# Altium PCB Adapter_JLink.PcbDoc
Units mm, origin at the board's own origin, x right, y up, seen from the top; angles counter-clockwise.
Board outline 23.62 x 33.91 mm, 2 copper layers (Top Layer, Bottom Layer), stack 1.621 mm thick; 12 components, 10 nets, 40 pads, 89 vias.
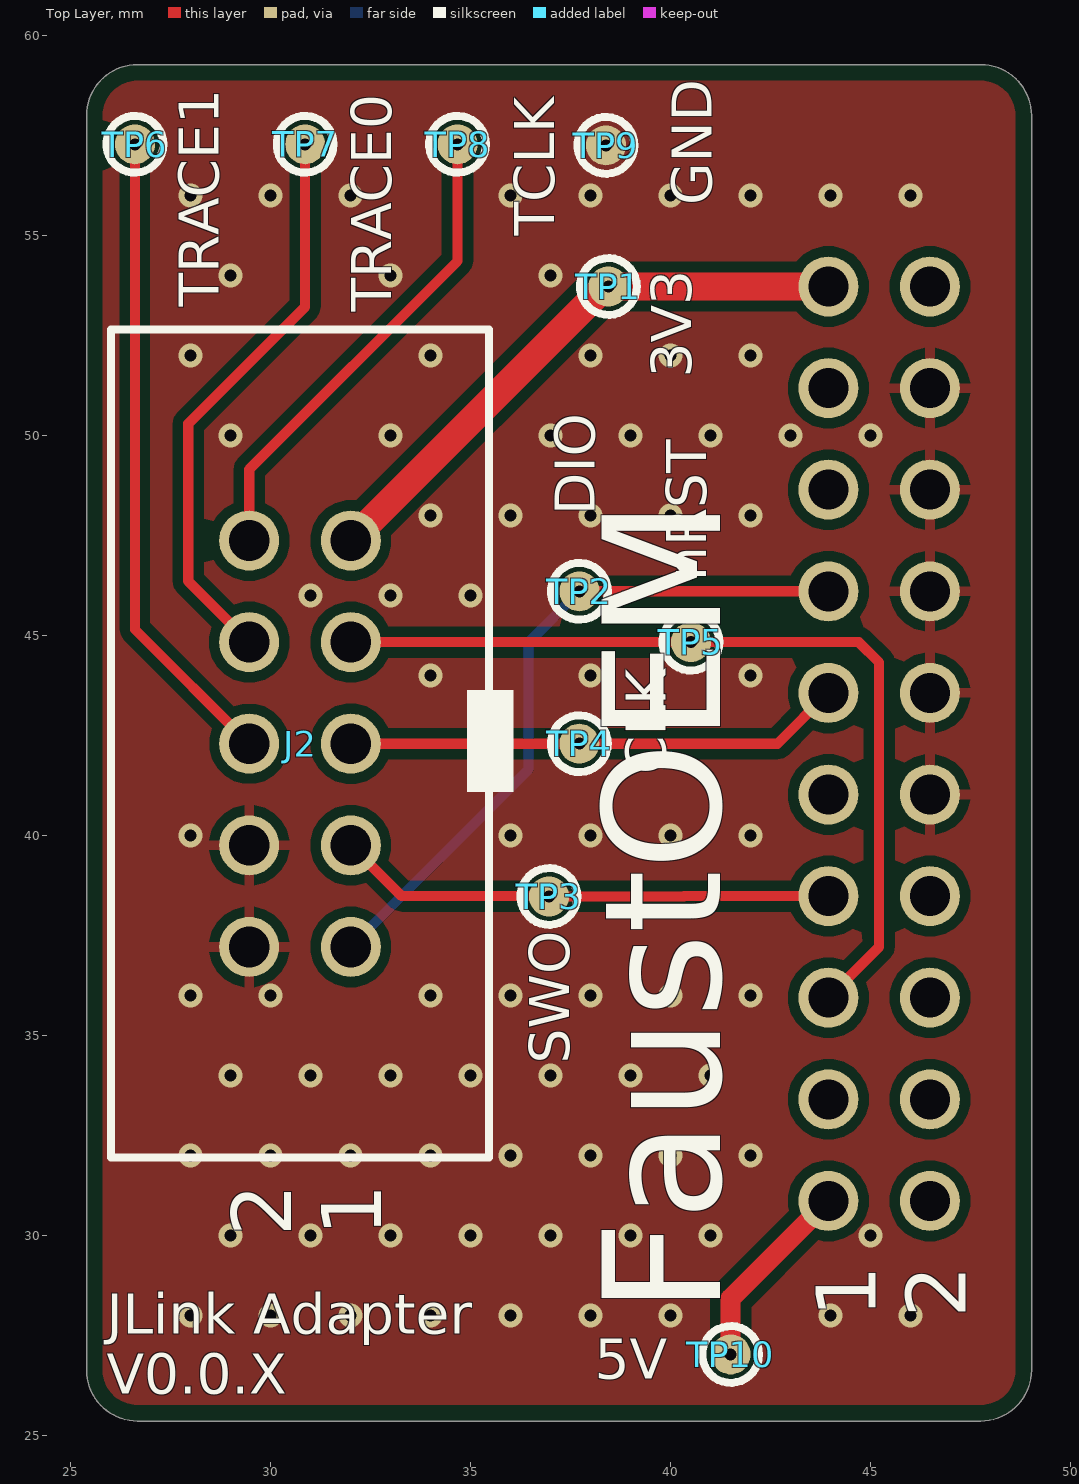
[diagram p0: Top Layer view]
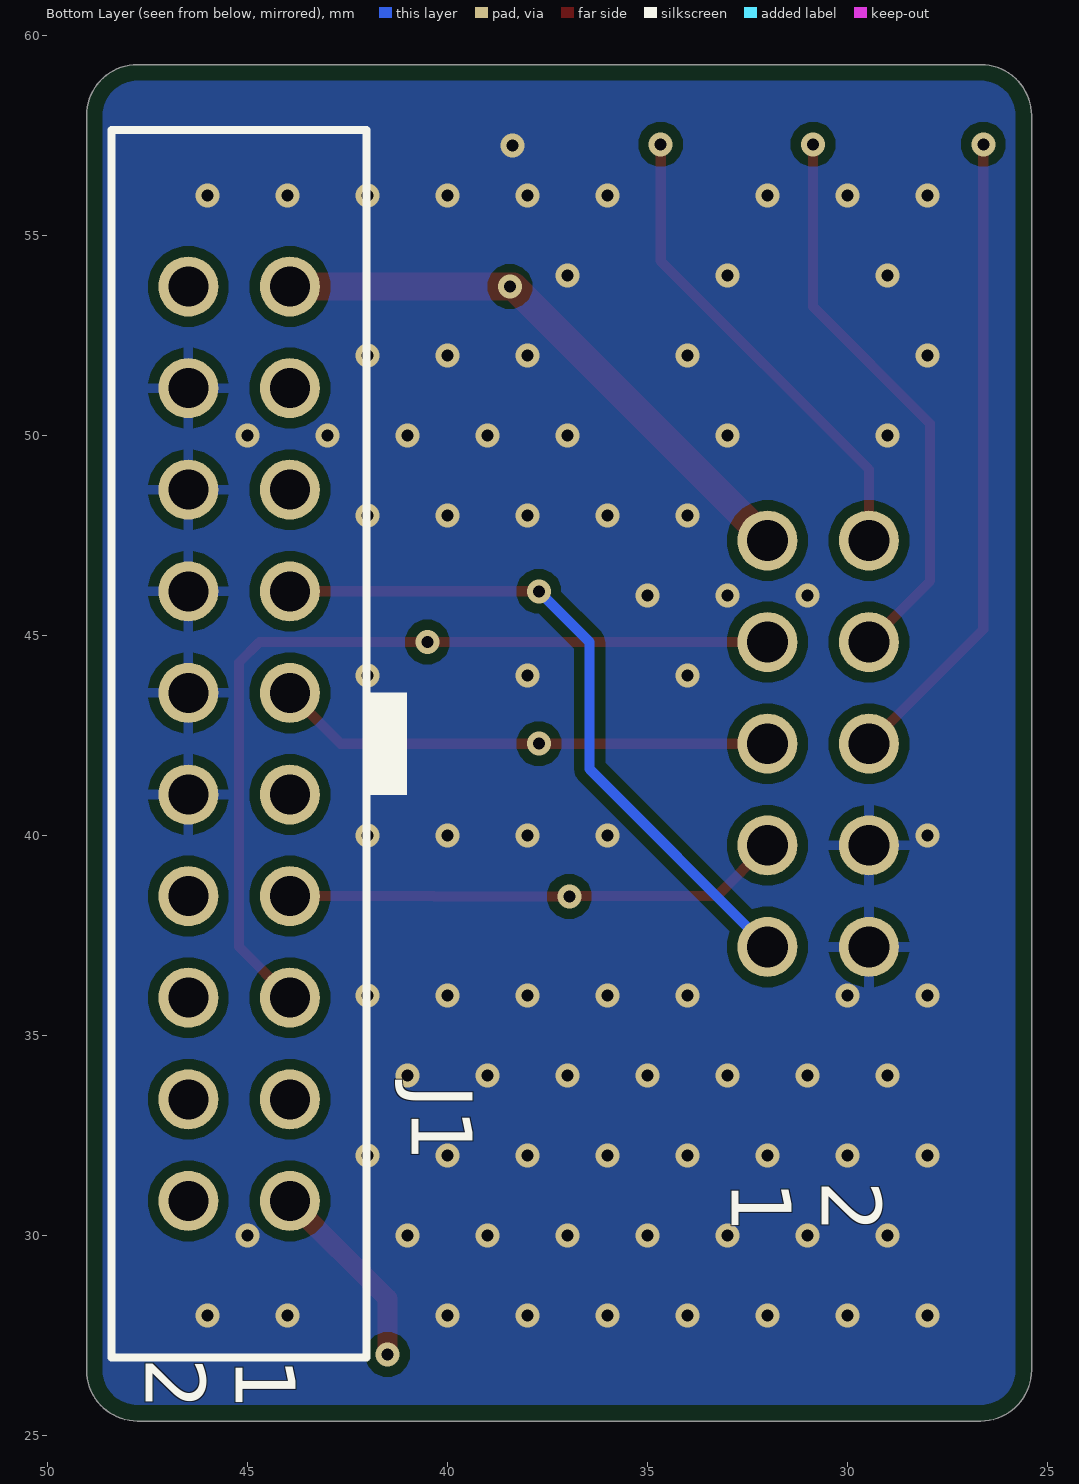
[diagram p1: Bottom Layer view, seen from below]

## Layer stack, top to bottom
Top Solder: solder mask 0.0102, Solder Resist, Dk 3.5
Top Layer: signal copper 0.0356
Dielectric 1: dielectric 1.55, FR-4, Dk 4.8
Bottom Layer: signal copper 0.0356
Bottom Solder: solder mask 0.0102, Solder Resist, Dk 3.5

## Board outline
25.4,26.628 ccw(c26.67,26.628) 26.67,25.358 47.752,25.358 ccw(c47.752,26.628) 49.022,26.628 49.022,57.997 ccw(c47.752,57.997) 47.752,59.267 26.67,59.267 ccw(c26.67,57.997) 25.4,57.997

## Design rules (kind name [scope] priority, off if disabled: settings)
BoardOutlineClearance BoardOutlineClearance_Component [IsComponent] p1: gap=0.254 ignorepadtopadclearanceinfootprint=FALSE except(0: Arc-SplitContinuation Track-SplitContinuation SMDPad-SplitContinuation THPad-SplitContinuation Via-SplitContinuation Fill-SplitContinuation Poly-SplitContinuation Region-SplitContinuation Text-SplitContinuation; 0.4: Track-OutlineEdge SMDPad-OutlineEdge THPad-OutlineEdge Via-OutlineEdge Fill-OutlineEdge Poly-OutlineEdge Region-OutlineEdge)
BoardOutlineClearance [All] p2: gap=0.254 ignorepadtopadclearanceinfootprint=FALSE except(0: Arc-SplitContinuation Track-SplitContinuation SMDPad-SplitContinuation THPad-SplitContinuation Via-SplitContinuation Fill-SplitContinuation Poly-SplitContinuation Region-SplitContinuation Text-SplitContinuation; 0.4: Track-OutlineEdge SMDPad-OutlineEdge THPad-OutlineEdge Via-OutlineEdge Fill-OutlineEdge Poly-OutlineEdge)
Clearance [All] p1: gap=0.254 ignorepadtopadclearanceinfootprint=FALSE except(0: Arc-Hole Track-Hole SMDPad-Hole THPad-Hole Via-Hole Fill-Hole Poly-Hole Region-Hole Text-Hole; 0.127: Arc-Arc Arc-Track Track-Track SMDPad-SMDPad; 0.2: SMDPad-THPad)
ComponentClearance [All] p1: gap=0.1 collisioncheckmode=3 verticalgap=0.254 showdistances=FALSE
HoleSize [All] p1: absolutevalues=TRUE maxlimit=6.3 minlimit=0.2 maxpercent=80.000 minpercent=20.000
HoleToHoleClearance [All] p1: gap=0.5 allowstackedmicrovias=TRUE
MinimumAnnularRing [All] p1: minimumring=0.13
MinimumSolderMaskSliver [All] p1: minsoldermaskwidth=0.05
PlaneConnect [All] p1: planeconnectstyle=Direct reliefexpansion=0.508 reliefentries=4 reliefconductorwidth=0.254 reliefairgap=0.254
PolygonConnect [All] p1: connectstyle=Direct reliefconductorwidth=0.254 reliefentries=4 polygonreliefangle="90 Angle" airgapwidth=0.254
RoutingVias [All] p1: holewidth=0.3 width=0.6 viastyle="Through Hole" minholewidth=0.3 minwidth=0.6 maxholewidth=6.3 maxwidth=6.3
SilkToSilkClearance [All] p1: silktosilkclearance=0
SilkToSolderMaskClearance [IsPad] p1: minsilkscreentomaskgap=0 clearancetoexposedcopper=TRUE
SolderMaskExpansion SolderMaskExpansion_via [isVia] p1: expansion=0.055 istentingtop=TRUE
SolderMaskExpansion SolderMaskExpansion_1 [All] p2: expansion=0.102 istentingtop=FALSE
Width [All] p1: maxlimit=1816.048 minlimit=0.127 preferedwidth=0.254 toplayer_maxwidth=1816.048 minimp=50.000000 maximp=50.000000 favimp=50.000000
23 further rules are at their usual default settings.

## Components (designator, comment, footprint, x,y, rotation, side; value= is the part's Value field where it differs from the comment)
J1 "SWV" "CONN HDR PLUG 20 2.54 TH STLINKV2" 45.212,42.291 r0 bottom locked
J2 "TAG CONN 10" "CONN HDR RECPT 10 2.54 TH TAG CONNECT" 30.734,42.291 r180 top locked
TP1 "1mm" TESTPOINT_SMT#1 38.442,53.721 r90 top
TP2 "1mm" TESTPOINT_SMT#1 37.719,46.101 r90 top
TP3 "1mm" TESTPOINT_SMT#1 36.957,38.473 r90 top
TP4 "1mm" TESTPOINT_SMT#1 37.717,42.291 r90 top
TP5 "1mm" TESTPOINT_SMT#1 40.506,44.831 r90 top
TP6 "1mm" TESTPOINT_SMT#1 26.607,57.277 r90 top
TP7 "1mm" TESTPOINT_SMT#1 30.861,57.277 r270 top
TP8 "1mm" TESTPOINT_SMT#1 34.671,57.277 r90 top
TP9 "1mm" TESTPOINT_SMT#1 38.381,57.25 r270 top
TP10 "1mm" TESTPOINT_SMT#2 41.502,27.024 r270 top

## Footprints (in the part's own frame and the unit in brackets; to place one, negate y for a bottom-side part, rotate by r counter-clockwise, add the part's x,y. Pads: shape width x height; smd on the part's side, far side on the other; paste and mask are expansions set on the pad)
"CONN HDR PLUG 20 2.54 TH STLINKV2" [mm]
  round 1.5 hole 1: 1(-1.27,11.43) 2(1.27,11.43) 3(-1.27,8.89) 4(1.27,8.89) 5(-1.27,6.35) 6(1.27,6.35) 7(-1.27,3.81) 8(1.27,3.81) 9(-1.27,1.27) 10(1.27,1.27) 11(-1.27,-1.27) 12(1.27,-1.27) 13(-1.27,-3.81) 14(1.27,-3.81) 15(-1.27,-6.35) 16(1.27,-6.35) 17(-1.27,-8.89) 18(1.27,-8.89) 19(-1.27,-11.43) 20(1.27,-11.43)
  silkscreen extent -4.19,-15.35 3.19,15.35, body extent -4.1,-15.16 3,15.16, height 8.51
"CONN HDR RECPT 10 2.54 TH TAG CONNECT" [mm]
  round 1.5 hole 1.02: 1(-1.27,5.08) 2(1.27,5.08) 3(-1.27,2.54) 4(1.27,2.54) 5(-1.27,0) 6(1.27,0) 7(-1.27,-2.54) 8(1.27,-2.54) 9(-1.27,-5.08) 10(1.27,-5.08)
  silkscreen extent -5.33,-10.35 4.73,10.35, body extent -4.43,-10.18 4.67,10.18, height 9.11
TESTPOINT_SMT#1 [mm] "testpoint smt"
  round 1 smd: 1(0,0)
TESTPOINT_SMT#2 [mm] "testpoint smt"
  round 1 smd paste-1111: 1(0,0)
  silkscreen extent -0.71,-0.71 0.71,0.71

## Part data
J1: library part "CONN HDR PLUG 20 2.54mm TH JLINK", "Female, 20C, Straight .100\"CC; No Mt. w/Center Polarizing Key; PBT, Brass, Gold Flash, 105 C", Color=Black, Manufacturer=Sullins, Manufacturer Part Number=SFH11-PBPC-D10-ST-BK, Package Quantity=1, Supplier Part Number 1=S9197-ND, Category="Headers and Wire Housings", ComponentLink1Description=https://datasheet.ciiva.com/754/sfh11-pxxc-dxx-st-xx11160-c-754558.pdf?src-supplier=Digi-Key, ComponentLink1URL=https://datasheet.ciiva.com/754/sfh11-pxxc-dxx-st-xx11160-c-754558.pdf?src-supplier=Digi-Key, Connector Type=Header, Contact Plating=Gold, Contact Type="Female Socket", Lead Free="Lead Free", Mount="Through Hole", Number of Positions=20, Number of Rows=2, Packaging=Tray, Pitch=0.1inch, Pricing 1="1=1.15000, 10=0.96800, 80=0.86925, 440=0.71118, 1000=0.63216, 5000=0.57070 (USD)", RoHS=Yes, RoHS Compliant=Yes, Row Spacing=0.1inch, Series=SFH11, Stock 1=18166, Supplier 1=Digi-Key, Termination=Solder
J2: library part "CONN HDR RECPT 10 2.54mm TH SWV", "Conn Shrouded Header HDR 10 POS 2.54mm Solder ST Thru-Hole", Color=Black, Manufacturer="On-Shore Technology", Manufacturer Part Number=302-S101, Supplier Part Number 1=ED1543-ND, Category=Connectors, ComponentLink1Description=https://datasheet.ciiva.com/732/302-sxxx-732946.pdf?src-supplier=Digi-Key, ComponentLink1URL=https://datasheet.ciiva.com/732/302-sxxx-732946.pdf?src-supplier=Digi-Key, Connector Type="Male Pin", Contact Plating=Gold, Contact Type="Male Pin", Mount="Through Hole", Number of Positions=10, Number of Rows=2, Packaging=Tray, Pitch=0.1inch, Pricing 1="1=0.29000, 10=0.24800, 100=0.19290, 500=0.16538, 1000=0.13781, 5000=0.11812, 10000=0.11025 (USD)", RoHS=Yes, Row Spacing=0.1inch, Series=302, Stock 1=61558, Supplier 1=Digi-Key, Termination=Solder
TP1 TP2 TP3 TP4 TP5 TP6 TP7 TP8 TP9 TP10: library part "TP 1mm", "SMT testpoint"

## Via types
v1: diameter 0.6, hole 0.3, Top Layer to Bottom Layer, tented both sides, 89 vias

## Nets (pads, with @x,y where several pads share a name; then routed paths per layer and width w, separated by ;. In a path a pad name is that pad's centre, name@x,y a point inside that pad or via, vN(x,y) a via of type N, cw(c..) or ccw(c..) an arc to the next point about the centre after c; other vN are vias at no path point)
3V3: J1.19 J2.9 TP1.1 | length 14.6
  Top Layer w0.7: J2.9 38.354,53.721 J1.19
  other v1: 38.442,53.721
5V: J1.1 TP10.1 | length 4.8
  Top Layer w0.5: v1(41.502,27.024) 41.502,28.421 J1.1
GND: J1.10 J1.12 J1.14 J1.16 J1.18 J2.2 J2.4 TP9.1
  other v1: 28,28 30,28 32,28 34,28 36,28 38,28 40,28 44,28 46,28 29,30 31,30 33,30 35,30 37,30 39,30 41,30 45,30 28,32 30,32 32,32 34,32 36,32 38,32 40,32 42,32 29,34 31,34 33,34 35,34 37,34 39,34 41,34 28,36 30,36 34,36 36,36 38,36 40,36 42,36 28,40 36,40 38,40 40,40 42,40 34,44 38,44 42,44 31,46 33,46 35,46 34,48 36,48 38,48 40,48 42,48 29,50 33,50 37,50 39,50 41,50 43,50 45,50 28,52 34,52 38,52 40,52 42,52 29,54 33,54 37,54 28,56 30,56 32,56 36,56 38,56 40,56 42,56 44,56 46,56 38.381,57.25
nRST: J1.5 J2.7 TP5.1 | length 22.3
  Top Layer w0.254: J2.7 44.704,44.831 45.212,44.323 45.212,37.211 J1.5
  other v1: 40.506,44.831
SWCLK: J1.11 J2.5 TP4.1 | length 12.5
  Top Layer w0.254: J2.5 42.672,42.291 J1.11
  other v1: 37.717,42.291
SWDIO: J1.13 J2.1 TP2.1 | length 17.5
  Top Layer w0.254: v1(37.719,46.101) J1.13
  Bottom Layer w0.254: J2.1 36.449,41.656 36.449,44.831 v1(37.719,46.101)
SWO: J1.7 J2.3 TP3.1 | length 12.5
  Top Layer w0.254: J2.3 33.274,38.481 36.949,38.481 v1(36.957,38.473) 40.33,38.473 40.338,38.481 J1.7
TRACE0: J2.8 TP7.1 | length 14.3
  Top Layer w0.254: J2.8 27.94,46.355 27.94,50.292 30.861,53.213 v1(30.861,57.277)
TRACE1: J2.6 TP6.1 | length 16.2
  Top Layer w0.254: v1(26.607,57.277) 26.607,45.148 J2.6
TRACE_CLK: J2.10 TP8.1 | length 12.1
  Top Layer w0.254: J2.10 29.464,49.149 34.671,54.356 v1(34.671,57.277)
pads on no net: J1.2 J1.3 J1.4 J1.6 J1.8 J1.9 J1.15 J1.17 J1.20

## Polygon pours and split planes (outlines as drawn)
GND on Top Layer "GND_L01_P000" (solid, remove dead copper, pour order 0): 25.4,25.4 49.022,25.4 49.022,59.055 25.4,59.055
GND on Bottom Layer "GND_L02_P001" (solid, remove dead copper, pour order 1): 25.4,25.4 49.022,25.4 49.022,59.055 25.4,59.055

## Silkscreen, mask and mechanical layers (free items; w line width, h text height)
Top Overlay:
  circle w0.2: c40.506,44.831 r0.71
  circle w0.2: c37.719,46.101 r0.71
  circle w0.2: c37.717,42.291 r0.71
  circle w0.2: c36.957,38.473 r0.71
  circle w0.2: c38.381,57.25 r0.71
  circle w0.2: c30.861,57.277 r0.71
  circle w0.2: c34.671,57.277 r0.71
  circle w0.2: c38.442,53.721 r0.71
  circle w0.2: c26.607,57.277 r0.71
  text "GND" at 41.021,55.753 h1 r90
  text "TCLK" at 37.084,54.991 h1 r90
  text "TRACE1" at 28.702,53.213 h1 r90
  text "TRACE0" at 33.02,53.086 h1 r90
  text "3V3" at 40.513,51.435 h1 r90
  text "DIO" at 38.1,48.006 h1 r90
  text "nRST" at 40.885,46.355 h1 r90
  text "CLK" at 39.878,41.529 h1 r90
  text "SWO" at 37.465,34.29 h1 r90
  text "2 / 1" at 32.766,29.972 h1.5 r90
  text "FaustOEM" at 42.212,28.03 h5.08 r90
  text "1 / 2" at 47.371,27.94 h1.5 r90
  text "5V" at 38.1,26.416 h1
  text "JLink Adapter  / V0.0.X" at 25.908,26.035 h1
Bottom Overlay:
  text "2 / 1" at 32.893,31.369 h1.5 r90
  text "1 / 2" at 47.541,26.942 h1.5 r90
Board:
  lines w0.2: 25.4,57.933 25.4,42.313 25.4,26.628 ccw(c26.67,26.628) 26.67,25.358 47.752,25.358 ccw(c47.752,26.628) 49.022,26.628 49.022,42.377 49.022,57.997 ccw(c47.752,57.997) 47.752,59.267 26.67,59.267 ccw(c26.67,57.997) 25.4,57.997
Fab Notes:
  lines w0.381: 104.149,36.703 114.56,36.703 138.176,36.703 160.014,36.703 176.52,36.703 190.994,36.703 ; 104.149,39.751 114.56,39.751 138.176,39.751 160.014,39.751 176.52,39.751 190.994,39.751 ; 104.149,42.799 114.56,42.799 138.176,42.799 160.014,42.799 176.52,42.799 190.994,42.799 ; 104.149,45.847 114.56,45.847 138.176,45.847 160.014,45.847 176.52,45.847 190.994,45.847 ; 104.149,48.895 114.56,48.895 138.176,48.895 160.014,48.895 176.52,48.895 190.994,48.895 ; 104.149,51.943 114.56,51.943 138.176,51.943 160.014,51.943 176.52,51.943 190.994,51.943 ; 104.149,54.991 190.994,54.991 ; 114.56,58.039 114.56,33.655 ; 138.176,58.039 138.176,33.655 ; 160.014,58.039 160.014,33.655 ; 176.52,58.039 176.52,33.655 ; 114.56,33.655 104.149,33.655 104.149,58.039 190.994,58.039 190.994,33.655 176.52,33.655 ; 114.56,33.655 138.176,33.655 ; 138.176,33.655 160.014,33.655 ; 160.014,33.655 176.52,33.655
  text "Layer" at 105.927,55.753 h1.52
  text "Name" at 116.338,55.753 h1.52
  text "Material" at 139.954,55.753 h1.52
  text "Thickness" at 161.792,55.753 h1.52
  text "Constant" at 178.298,55.753 h1.52
  text "Top Overlay" at 116.338,52.705 h1.52
  text "Top Solder" at 116.338,49.657 h1.52
  text "Solder Resist" at 139.954,49.657 h1.52
  text "0.010mm" at 161.792,49.657 h1.52
  text "3.5" at 178.298,49.657 h1.52
  text "1" at 105.927,46.609 h1.52
  text "Top Layer" at 116.338,46.609 h1.52
  text "0.036mm" at 161.792,46.609 h1.52
  text "Dielectric 1" at 116.338,43.561 h1.52
  text "FR-4" at 139.954,43.561 h1.52
  text "1.550mm" at 161.792,43.561 h1.52
  text "4.8" at 178.298,43.561 h1.52
  text "2" at 105.927,40.513 h1.52
  text "Bottom Layer" at 116.338,40.513 h1.52
  text "0.036mm" at 161.792,40.513 h1.52
  text "Bottom Solder" at 116.338,37.465 h1.52
  text "Solder Resist" at 139.954,37.465 h1.52
  text "0.010mm" at 161.792,37.465 h1.52
  text "3.5" at 178.298,37.465 h1.52
  text "Bottom Overlay" at 116.338,34.417 h1.52
  text "Total board thickness:" at 105.927,31.369 h1.52
  text "1.641mm" at 161.792,31.369 h1.52
Drill Drawing:
  circle w0.254: c91.128,78.317 r0.847
  lines w0.254: 90.281,81.28 91.128,81.703 91.974,81.28 91.551,82.127 91.974,82.973 91.128,82.55 90.281,82.973 90.704,82.127 90.281,81.28 ; 90.281,85.09 91.974,85.09 91.974,86.783 90.281,86.783 90.281,85.09
  lines w0.381: 88.762,76.327 230.862,76.327 ; 88.762,87.757 230.862,87.757 ; 102.755,72.517 102.755,91.567 ; 117.483,72.517 117.483,91.567 ; 145.161,72.517 145.161,91.567 ; 158.01,72.517 158.01,91.567 ; 176.648,72.517 176.648,91.567 ; 214.737,72.517 214.737,91.567 ; 88.762,72.517 230.862,72.517 230.862,91.567 88.762,91.567 88.762,72.517
  text "Symbol" at 91.048,88.9 h1.83
  text "Count" at 103.898,88.9 h1.83
  text "Hole Size" at 118.626,88.9 h1.83
  text "Plated" at 146.304,88.9 h1.83
  text "Hole Type" at 159.153,88.9 h1.83
  text "Drill Layer Pair" at 177.791,88.9 h1.83
  text "Via/Pad" at 215.88,88.9 h1.83
  text "89" at 103.898,85.09 h1.52
  text "0.300mm (11.81mil)" at 118.626,85.09 h1.52
  text "PTH" at 146.304,85.09 h1.52
  text "Round" at 159.153,85.09 h1.52
  text "Top Layer - Bottom Layer" at 177.791,85.09 h1.52
  text "Via" at 215.88,85.09 h1.52
  text "20" at 103.898,81.28 h1.52
  text "1.000mm (39.37mil)" at 118.626,81.28 h1.52
  text "PTH" at 146.304,81.28 h1.52
  text "Round" at 159.153,81.28 h1.52
  text "Top Layer - Bottom Layer" at 177.791,81.28 h1.52
  text "Pad" at 215.88,81.28 h1.52
  text "10" at 103.898,77.47 h1.52
  text "1.020mm (40.16mil)" at 118.626,77.47 h1.52
  text "PTH" at 146.304,77.47 h1.52
  text "Round" at 159.153,77.47 h1.52
  text "Top Layer - Bottom Layer" at 177.791,77.47 h1.52
  text "Pad" at 215.88,77.47 h1.52
  text "119 Total" at 103.898,73.66 h1.52

## Dimensions
25.4,57.997 to 49.022,57.997 on Fab Notes
47.752,59.267 to 47.752,25.358 on Fab Notes